# Altium PCB Headstage_Mainboard.PcbDoc
Units mil, origin at the board's own origin, x right, y up, seen from the top; angles counter-clockwise.
Board outline 4600 x 5400 mil, 4 copper layers (Top Copper Layer, Internal Copper Layer 1, Internal Copper Layer 2, Bottom Copper Layer), stack 62.205 mil thick; 8 components, 96 nets, 340 pads, 19 vias.
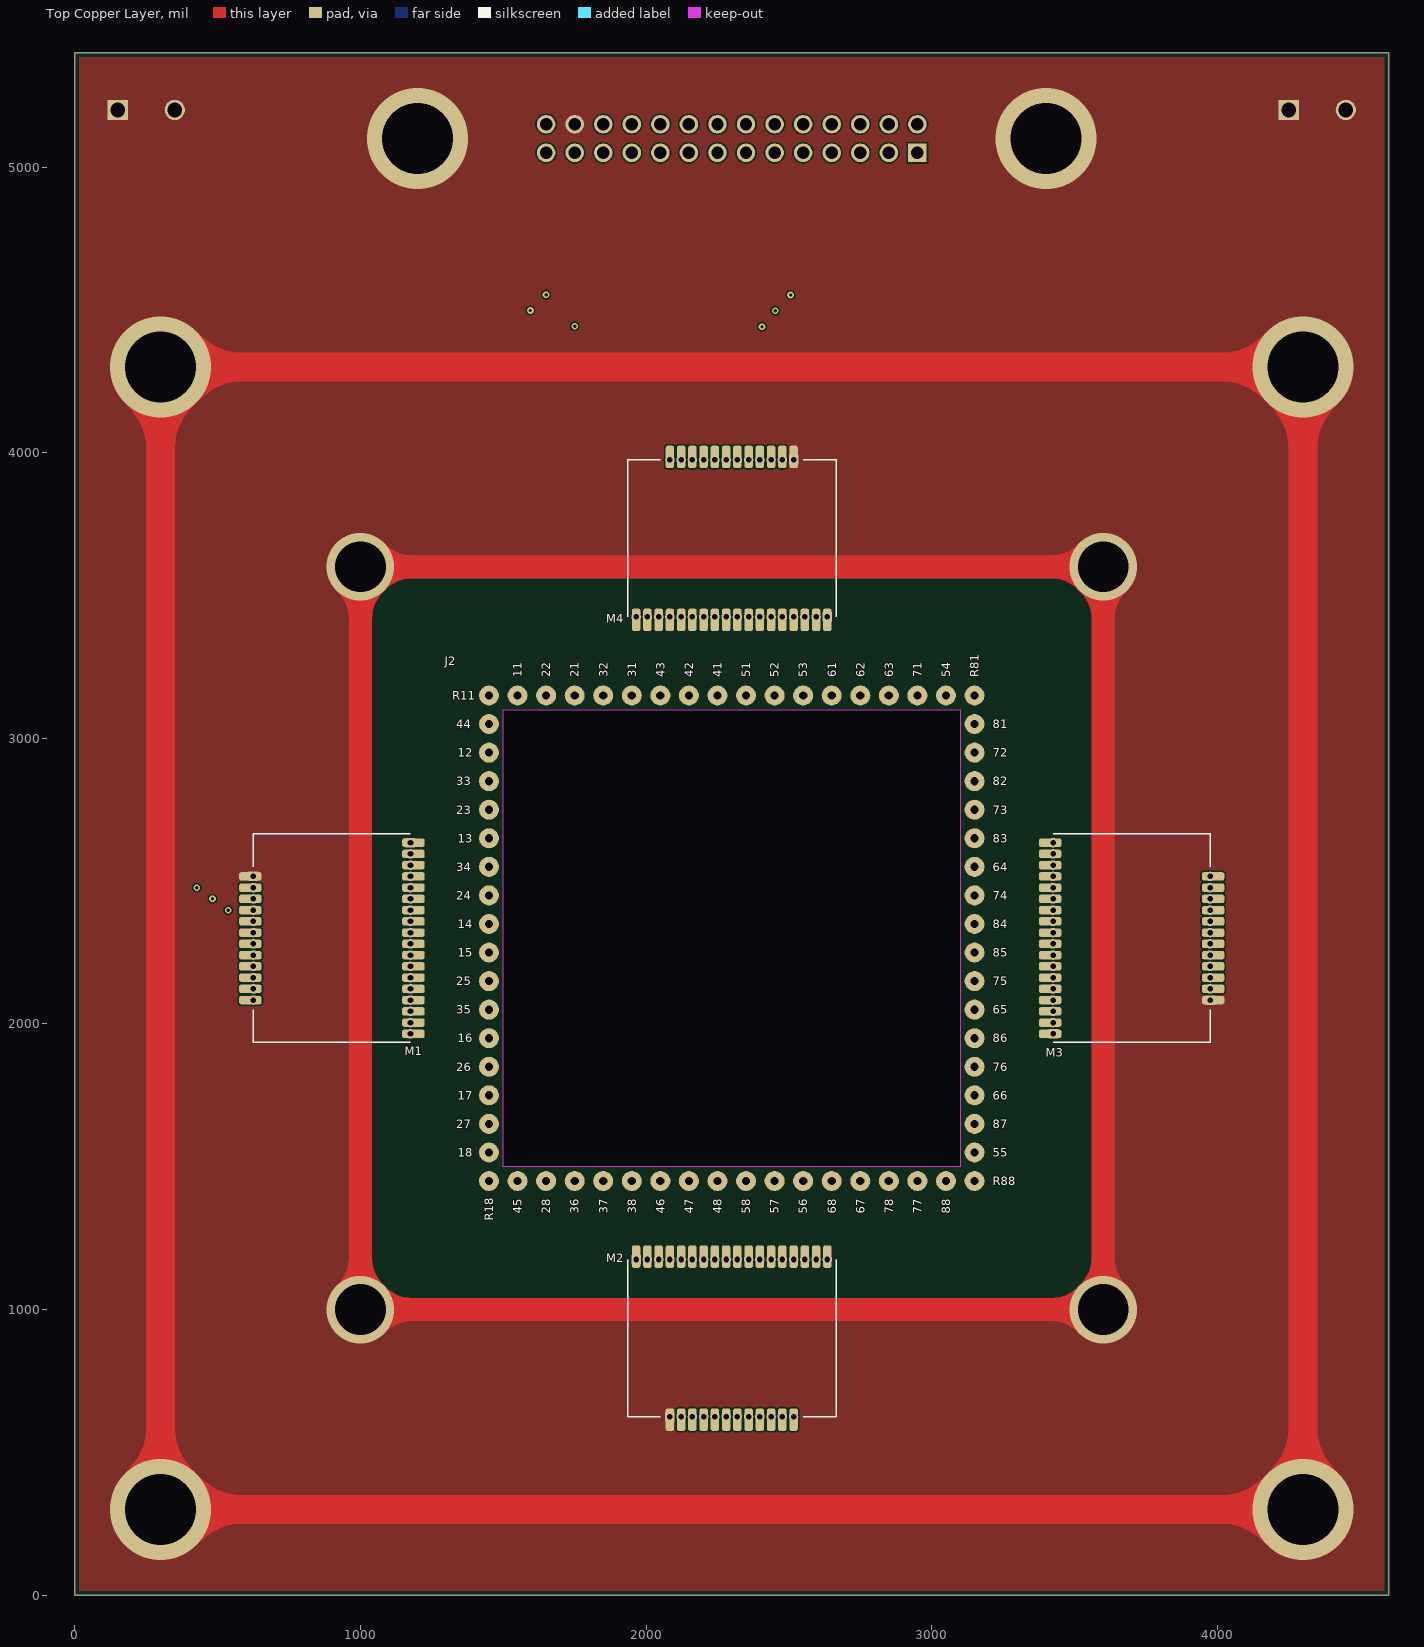
[diagram p0: Top Copper Layer view]
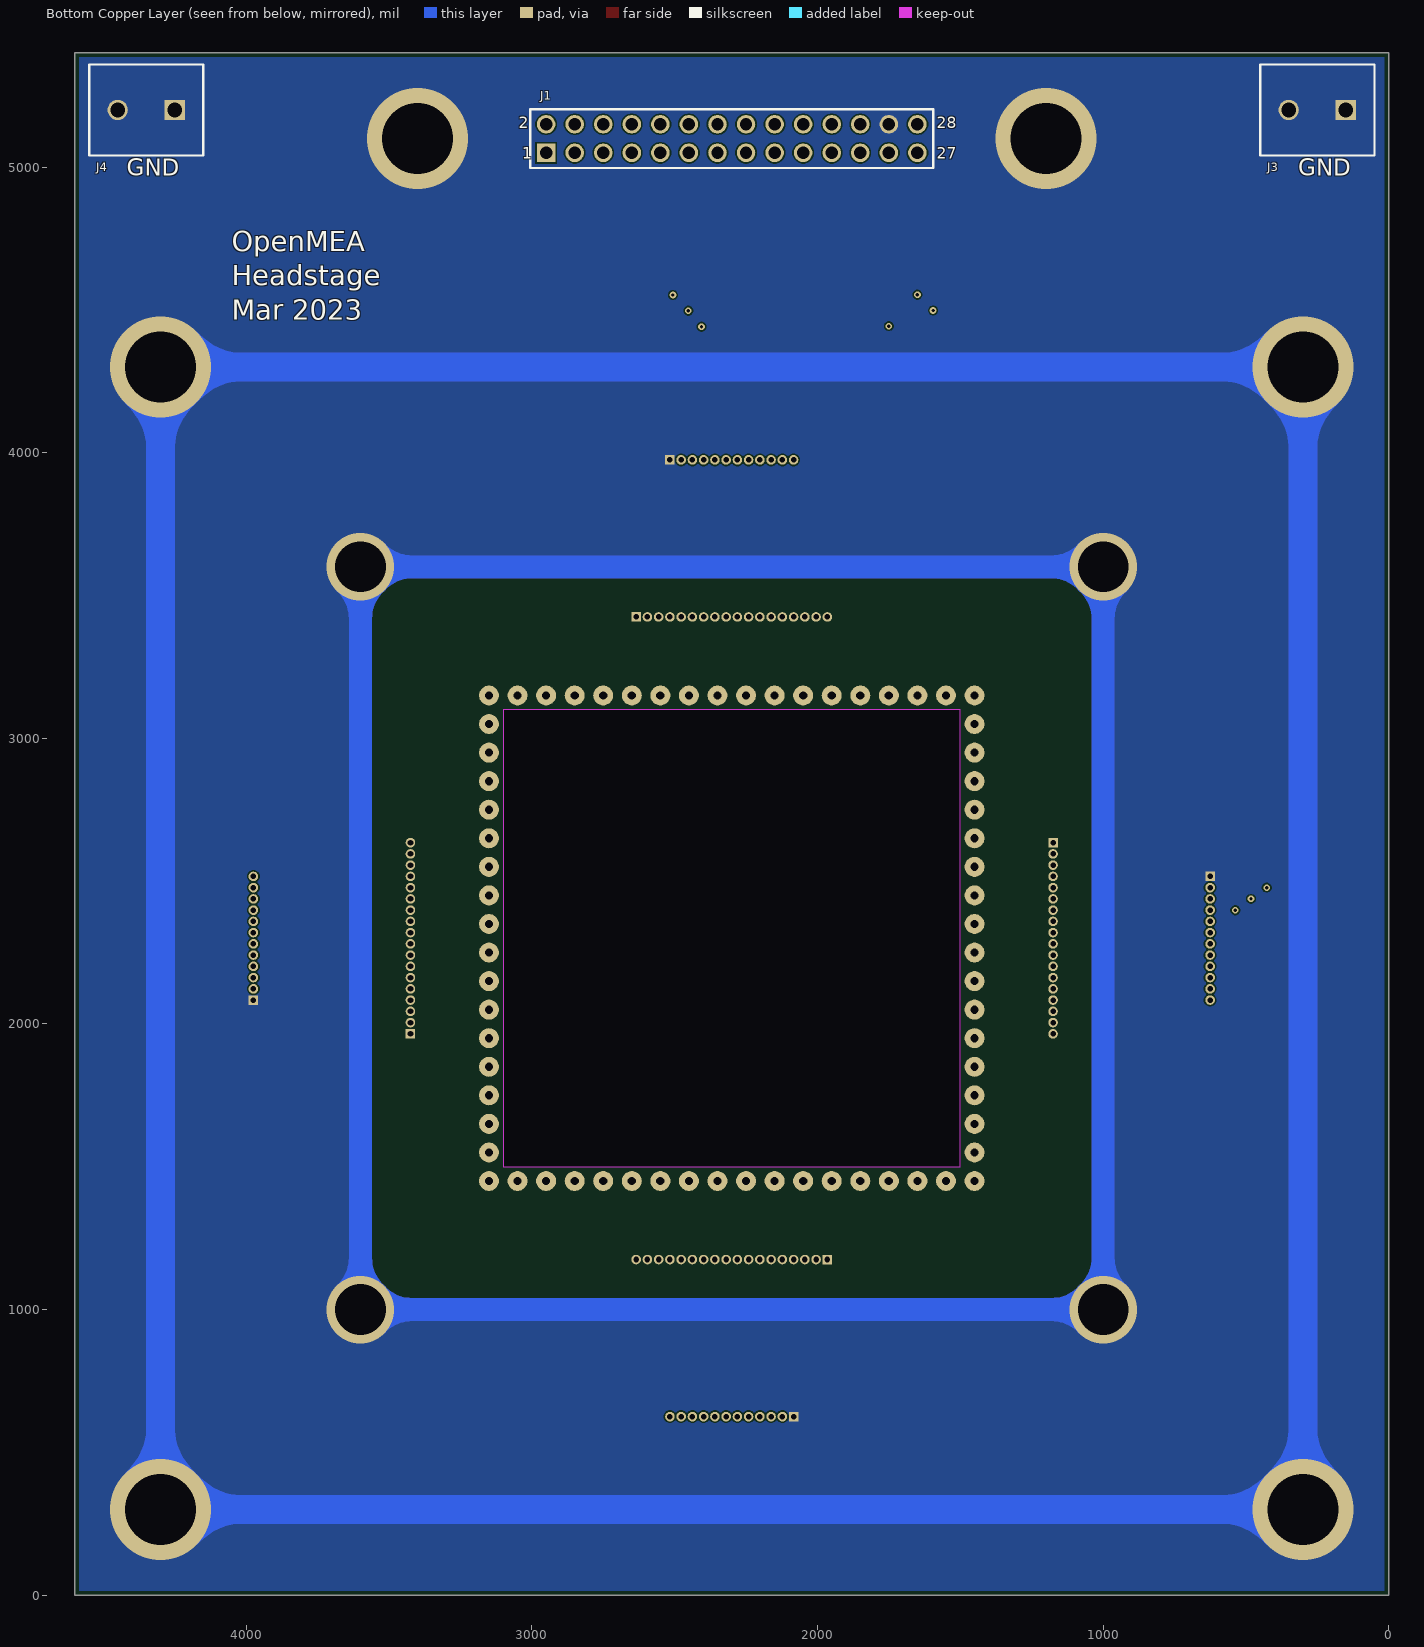
[diagram p1: Bottom Copper Layer view, seen from below]
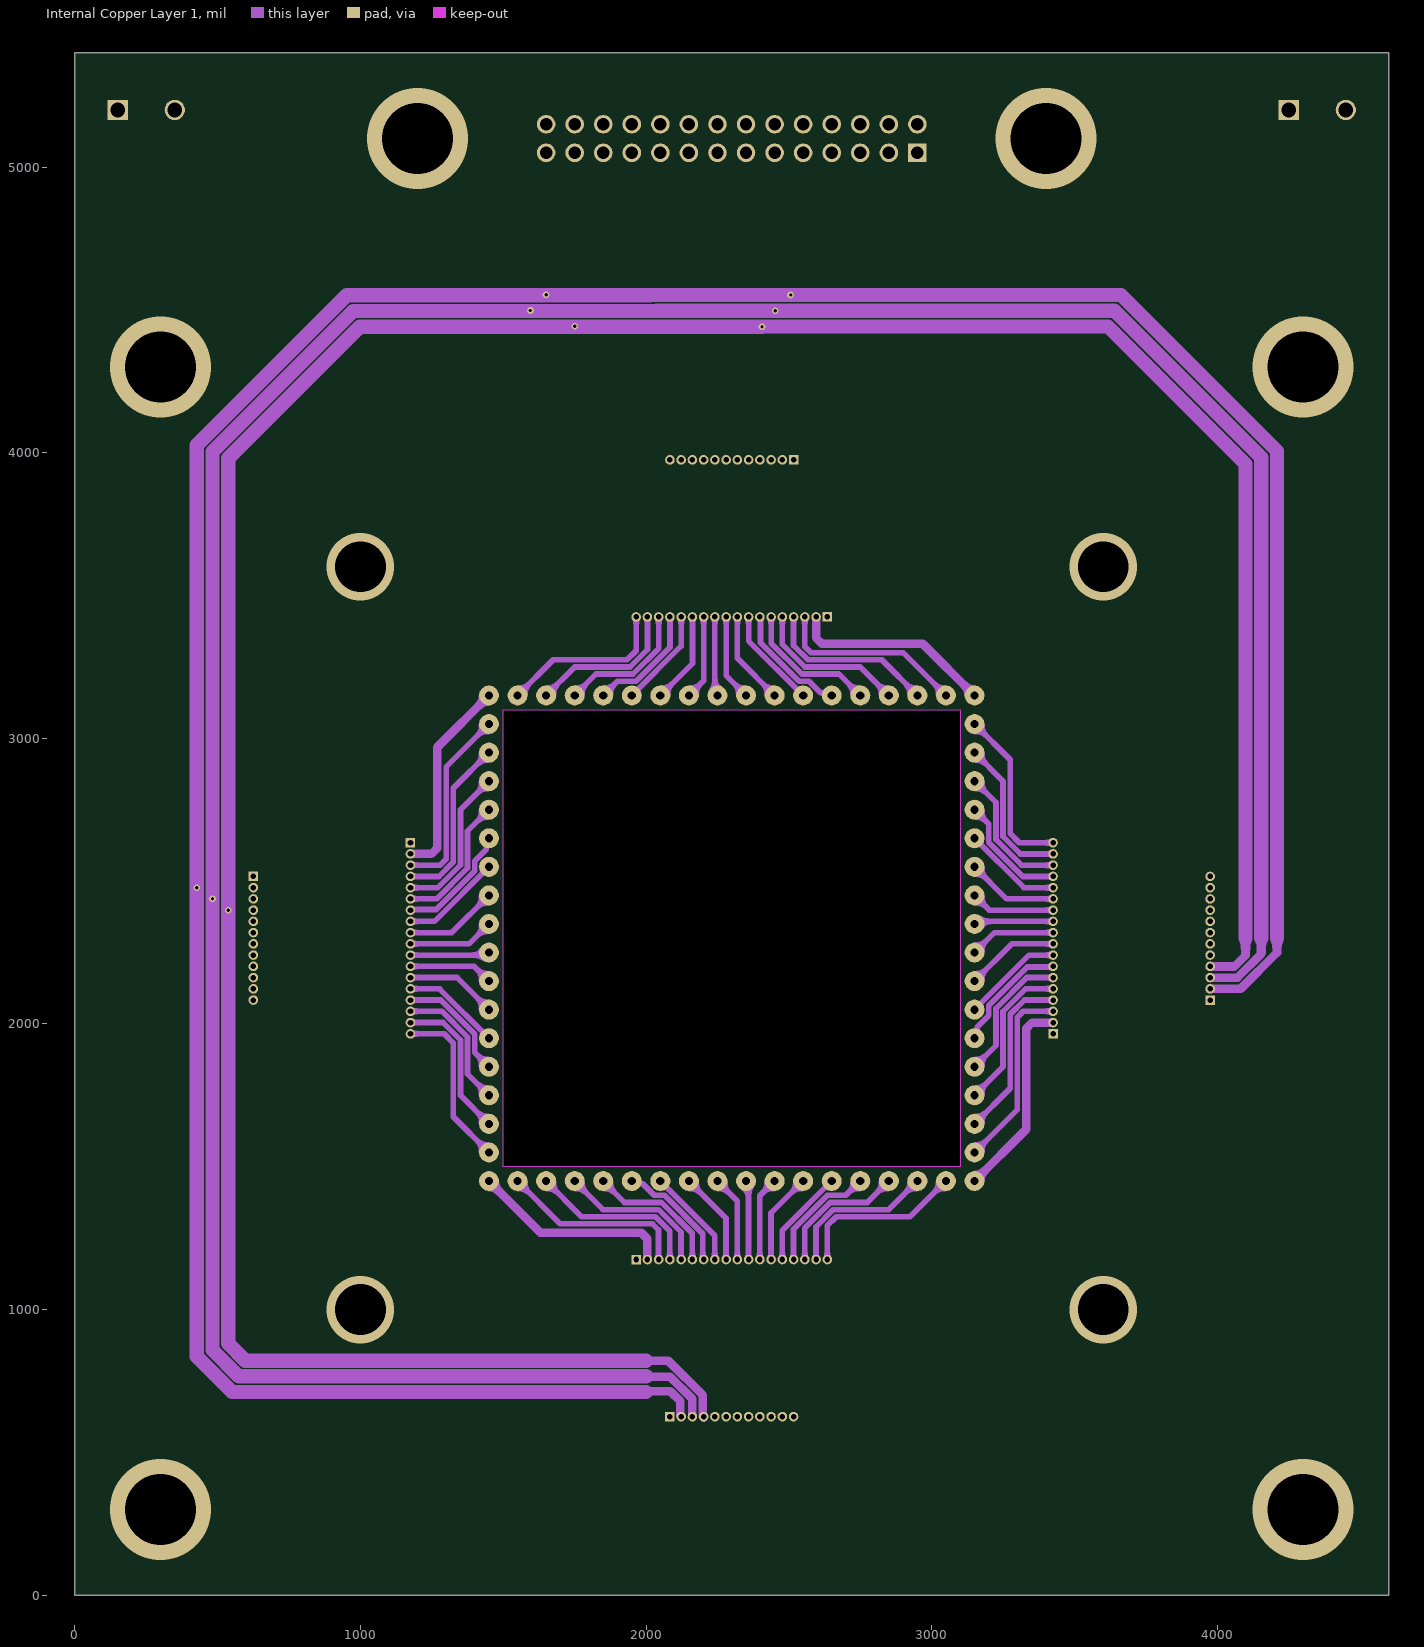
[diagram p2: Internal Copper Layer 1]
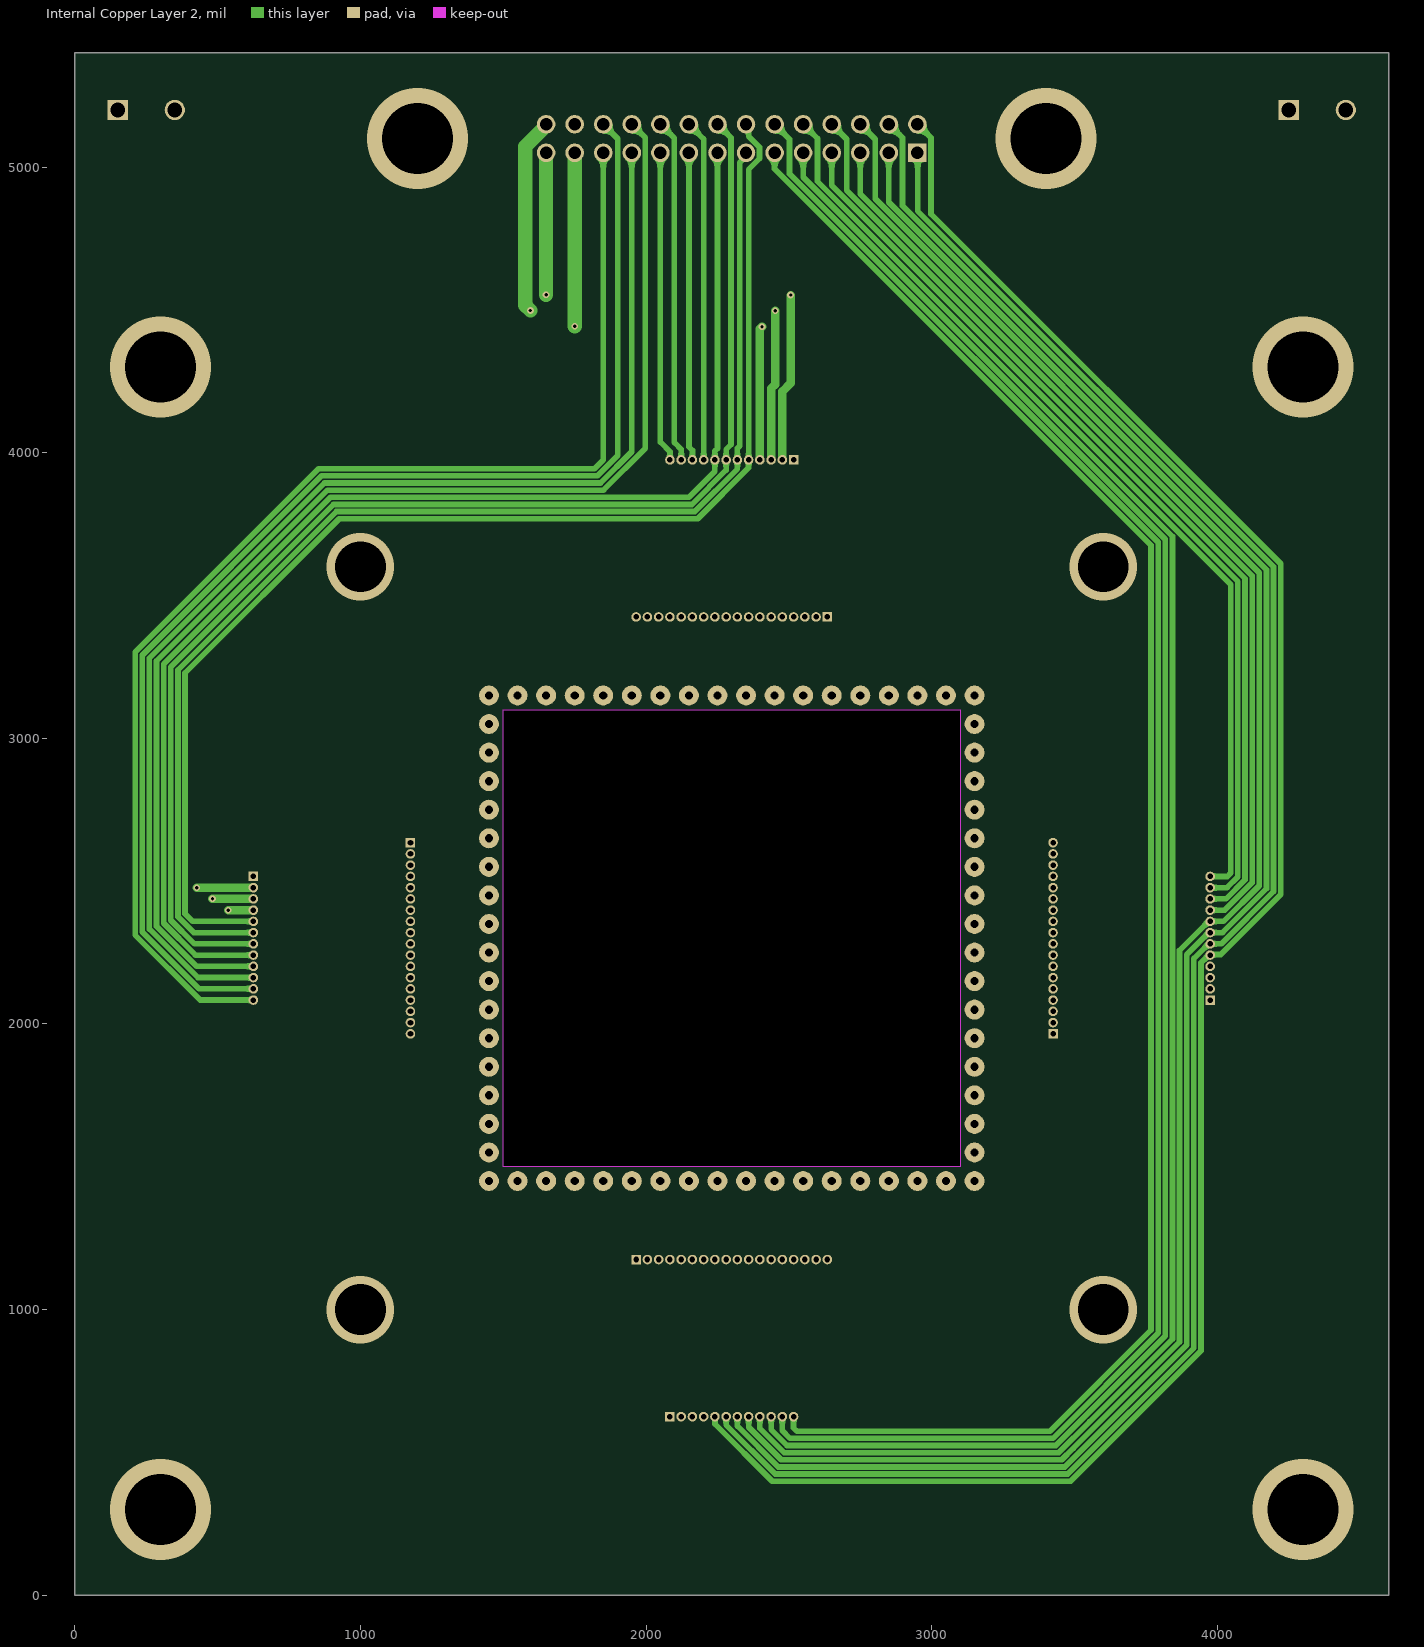
[diagram p3: Internal Copper Layer 2]

## Layer stack, top to bottom
Top Solder: solder mask 0.3937, Solder Resist, Dk 3.5
Top Copper Layer: signal copper 1.378
Dielectric 1: prepreg 8.6614, FR-4, Dk 4.2
Internal Copper Layer 1: signal copper 1.378
Dielectric 2: core 39.3701, FR-4, Dk 4.2
Internal Copper Layer 2: signal copper 1.378
Dielectric 3: prepreg 8.6614, FR-4, Dk 4.2
Bottom Copper Layer: signal copper 1.378
Bottom Solder: solder mask 0.3937, Solder Resist, Dk 3.5

## Board outline
0,0 4600,0 4600,5400 0,5400
cut-out: 1500,3100 3100,3100 3100,1500 1500,1500

## Design rules (kind name [scope] priority, off if disabled: settings)
BoardOutlineClearance [All] p1: gap=15 ignorepadtopadclearanceinfootprint=FALSE
Clearance [All] p1: gap=5 ignorepadtopadclearanceinfootprint=TRUE
ComponentClearance [All] p1: gap=5.91 collisioncheckmode=3 verticalgap=5.91 showdistances=FALSE
HoleSize [All] p1: absolutevalues=TRUE maxlimit=248.03 minlimit=9.84 maxpercent=80.000 minpercent=20.000
HoleToHoleClearance [All] p1: gap=17.72 allowstackedmicrovias=TRUE
MinimumAnnularRing [All] p1: minimumring=5.91
MinimumSolderMaskSliver [All] p1: minsoldermaskwidth=5.9
PlaneClearance [All] p1: clearance=5.91
PlaneConnect [All] p1: planeconnectstyle=Relief reliefexpansion=9.84 reliefentries=4 reliefconductorwidth=5.91 reliefairgap=5.91
PolygonConnect [All] p1: connectstyle=Direct reliefconductorwidth=5.91 reliefentries=4 polygonreliefangle="90 Angle" airgapwidth=5.91
RoomDefinition Headstage_Mainboard [InComponentClass('Headstage_Mainboard')] p1 off: confinementstyle=ConfineIn formatcopy=TRUE lockcomponents=FALSE outline 0,0 2000,0 2000,1000 0,1000
RoutingVias [All] p1: holewidth=9.84 width=21.65 viastyle="Through Hole" minholewidth=9.84 minwidth=21.65 maxholewidth=248.03 maxwidth=354.33
SilkToSilkClearance [All] p1: silktosilkclearance=5
SilkToSolderMaskClearance [IsPad] p1: minsilkscreentomaskgap=7.87 clearancetoexposedcopper=TRUE
SolderMaskExpansion [All] p1: expansion=0 istentingtop=FALSE
Width [All] p1: maxlimit=1968.5 minlimit=5.91 preferedwidth=5.91
22 further rules are at their usual default settings.

## Components (designator, comment, footprint, x,y, rotation, side; value= is the part's Value field where it differs from the comment)
J1 "61302821121" 61302821121 2300,5100 r180 bottom
J2 "POGO_PINS_64_4_V01" POGO_PINS_64_4_V01 2300,2300 r0 top locked
J3 "1729128" PHOE-1729128-2_V 250,5200 r0 bottom
J4 "1729128" PHOE-1729128-2_V 4350,5200 r0 bottom
M1 "Intan_RHS2116_Module" Intan_RHS2116_Module 900,2300 r270 top locked
M2 "Intan_RHS2116_Module" Intan_RHS2116_Module 2300,900 r0 top locked
M3 "Intan_RHS2116_Module" Intan_RHS2116_Module 3700,2300 r90 top locked
M4 "Intan_RHS2116_Module" Intan_RHS2116_Module 2300,3700 r180 top locked

## Footprints (in the part's own frame and the unit in brackets; to place one, negate y for a bottom-side part, rotate by r counter-clockwise, add the part's x,y. Pads: shape width x height; smd on the part's side, far side on the other; paste and mask are expansions set on the pad)
61302821121 [mm] "Pin Header, pitch 2.54 mm, THT, Vertical, dual row, 28p"
  rect 1.65x1.65 hole 1.1: 1(-16.51,-1.27)
  round 1.65 hole 1.1: 2(-16.51,1.27) 3(-13.97,-1.27) 4(-13.97,1.27) 5(-11.43,-1.27) 6(-11.43,1.27) 7(-8.89,-1.27) 8(-8.89,1.27) 9(-6.35,-1.27) 10(-6.35,1.27) 11(-3.81,-1.27) 12(-3.81,1.27) 13(-1.27,-1.27) 14(-1.27,1.27) 15(1.27,-1.27) 16(1.27,1.27) 17(3.81,-1.27) 18(3.81,1.27) 19(6.35,-1.27) 20(6.35,1.27) 21(8.89,-1.27) 22(8.89,1.27) 23(11.43,-1.27) 24(11.43,1.27) 25(13.97,-1.27) 26(13.97,1.27) 27(16.51,-1.27) 28(16.51,1.27)
  silkscreen extent -17.93,-2.62 17.93,2.62, body extent -17.78,-2.54 17.78,2.54, height 8.59
Intan_RHS2116_Module [mm]
  rrect50% 0.75x2 smd: 1(-5.5,-7.25) 2(-4.5,-7.25) 3(-3.5,-7.25) 4(-2.5,-7.25) 5(-1.5,-7.25) 6(-0.5,-7.25) 7(0.5,-7.25) 8(1.5,-7.25) 9(2.5,-7.25) 10(3.5,-7.25) 11(4.5,-7.25) 12(5.5,-7.25) 13(-8.5,7.25) 14(-7.5,7.25) 15(-6.5,7.25) 16(-5.5,7.25) 17(-4.5,7.25) 18(-3.5,7.25) 19(-2.5,7.25) 20(-1.5,7.25) 21(-0.5,7.25) 22(0.5,7.25) 23(1.5,7.25) 24(2.5,7.25) 25(3.5,7.25) 26(4.5,7.25) 27(5.5,7.25) 28(6.5,7.25) 29(7.5,7.25) 30(8.5,7.25)
  rect 0.85x0.85 hole 0.5: 1(-5.5,-6.985) 13(-8.5,6.985)
  round 0.85 hole 0.5: 2(-4.5,-6.985) 3(-3.5,-6.985) 4(-2.5,-6.985) 5(-1.5,-6.985) 6(-0.5,-6.985) 7(0.5,-6.985) 8(1.5,-6.985) 9(2.5,-6.985) 10(3.5,-6.985) 11(4.5,-6.985) 12(5.5,-6.985) 14(-7.5,6.985) 15(-6.5,6.985) 16(-5.5,6.985) 17(-4.5,6.985) 18(-3.5,6.985) 19(-2.5,6.985) 20(-1.5,6.985) 21(-0.5,6.985) 22(0.5,6.985) 23(1.5,6.985) 24(2.5,6.985) 25(3.5,6.985) 26(4.5,6.985) 27(5.5,6.985) 28(6.5,6.985) 29(7.5,6.985) 30(8.5,6.985)
  Top Copper Layer lines w0.254: 1.483,6.813 1.483,6.975 ; -0.38,6.86 -0.494,6.975 ; 4.483,6.884 4.483,6.975 ; 5.463,6.955 5.483,6.975
  Top Copper Layer lines w0.381: 3.557,-6.974 3.526,-6.944 ; 1.557,-6.974 1.467,-6.885 ; 0.557,-6.974 0.467,-6.885 ; -0.443,-6.974 -0.443,-6.892 ; -1.443,-6.974 -1.443,-6.892
  silkscreen extent -9.27,-6.99 9.27,6.99, body extent -9.27,-6.99 9.27,6.98, height 2.6
PHOE-1729128-2_V [mm] "Receptacle, 2-Leads, Body 8.1x10.16mm, Pitch 5.08mm"
  rect 1.8x1.8 hole 1.3: 1(-2.54,0)
  round 1.8 hole 1.3: 2(2.54,0)
  silkscreen extent -5.08,-4.05 5.08,4.05, body extent -5.65,-4.05 5.08,4.05, height 10.01
POGO_PINS_64_4_V01 [mil]
  round 70 hole 29: 11(-750,850) 12(-850,650) 13(-850,350) 14(-850,50) 15(-850,-50) 16(-850,-350) 17(-850,-550) 18(-850,-750) 21(-550,850) 22(-650,850) 23(-850,450) 24(-850,150) 25(-850,-150) 26(-850,-450) 27(-850,-650) 28(-650,-850) 31(-350,850) 32(-450,850) 33(-850,550) 34(-850,250) 35(-850,-250) 36(-550,-850) 37(-450,-850) 38(-350,-850) 41(-50,850) 42(-150,850) 43(-250,850) 44(-850,750) 45(-750,-850) 46(-250,-850) 47(-150,-850) 48(-50,-850) 51(50,850) 52(150,850) 53(250,850) 54(750,850) 55(850,-750) 56(250,-850) 57(150,-850) 58(50,-850) 61(350,850) 62(450,850) 63(550,850) 64(850,250) 65(850,-250) 66(850,-550) 67(450,-850) 68(350,-850) 71(650,850) 72(850,650) 73(850,450) 74(850,150) 75(850,-150) 76(850,-450) 77(650,-850) 78(550,-850) 81(850,750) 82(850,550) 83(850,350) 84(850,50) 85(850,-50) 86(850,-350) 87(850,-650) 88(750,-850) R11(-850,850) R18(-850,-850) R81(850,850) R88(850,-850)
  body extent -886,-886 886,886, height 303

## Part data
J1: library part CMP-1502-01115-1, "THT Vertical Pin Header WR-PHD, Pitch 2.54 mm, Dual Row, 28 pins", Contact Resistance=20mOhm, Manufacturer="Wurth Elektronik", Operating Temperature=-40to105degC, Rated Current=3A, Withstanding Voltage=500VAC, Working Voltage=250VAC, Datasheet URL=https://katalog.we-online.de/em/datasheet/6130xx21121.pdf, Gender=Male, Manufacturer URL=http://www.we-online.de, Mounting Technology=THT, Orientation=Vertical, Package Reference=61302821121, Packaging=Bag, Part Number=61302821121, Pin Number=28, Pitch=2.54mm, Publisher=WurthElektronik, Row Number=Dual
J2: "Pogo pins, 64 recording, 4 reference, v01"
J3 J4: library part CMP-2000-05815-1, "PCB Terminal Block, 13.5 A, 400 V, 2-Pin THD, RoHS, Bulk", Current Rating=13500mA, Manufacturer="Phoenix Contact", Package Description="2-Pin Through Hole Device, Body 8.1 x 10.16 mm, Pitch 5.08 mm", Package Reference=1729128-2, Package Version=03/2015, Voltage Rating=400V, Datasheet URL=https://datasheet.ciiva.com/16046/1729128-16046181.pdf, Datasheet Version=12/2013, Manufacturer URL=http://www.phoenixcontact.com/, Mounting Technology=ThroughHole, No. of Positions=2, No. of Rows=1, Orientation=Horizontal, Package URL=https://www.phoenixcontact.com/online/portal/pi/pxc/product_detail_page/!ut/p/b1/3VdJjqNKFDxLH8AFycySyWY2ozFsEPOMMQaDOX1XedGL_1Vdm5YXJleknhSKeBkvI6EA8ncAo3AYoDhBQGco6KN7VURTdemj9us_IEKEZo_YHiPAEWEFmDGOHMORkqKYCORBZxgL7ZoaZYcbFFUZ3fqxSY6GOuxydWUuHqz1ynmMFygu583Bob0Ewr6Sd_l-5m-kAueHiB0jpRwZwe58wwtkpxtMYd_LmGcDRU02dRNEyWt6Y2ti5pSyJ_reIkzIulrqApdnbT11V5jnCKbYNCvhEM1MCpPByat_X379-iThf08CI5GfOPqfBeS3BRoBOdD55AKVv0iLwCMq-2BrzXWSGRH7pUGD9uwXQjiph3xL0DKQwdGa0JImiIOmBNOestqgwTHSSs2oOep-78apyXQBvNi8ZLaFjvjWvcaUEBu0MC6Wbe-d6mB0FAebo2lUWinqYaZs5DAYzV0RP9yitUjnGJ0iI9xhZkT42OCQNUJJhkgWINNQLP2JFP6OpMg3JCVg70jqHT0lvKOnhHf0lPuOnnLf0VPuWx6_dxwUIvwk5WMkT0kLL1mh61l2yZVSzG3pYV_bqo-mj6uMKwKwdnnW8Jh5RTOJzMOA5c-eJDaZQw4mTMPH02PvS_ZAqNVjVTo2WyYLkwH_KU1mmmG5kjRhDqPXLwwVHvVOjCM60-fpXvTDfMGW1PVFVS1r4e4yVDk4ZdNbkUHvqPqQSeian4UD39fNKmachqdJ1NJbyk8rXT9mXTvPk3oE5meulKGgiruPJek-4I9hTT6G8ZLOyRSm2RRVbThERQad5OS28hdt4YW4vG0stgYYzsWsK4_7y6DZMjJSCqri1kyiZR5vD7pwIrNR7QwPHTcLTI5qT7eRlpHrdGiupYlqQDJ7zy_CND8fWWBoLRXxk1RVcXiBQwbTD4Xi7KL-FuO94t9xaqweXzH, Packing=Bulk, PartNumber=1729128, Pitch=5.08mm, RoHS=TRUE

## Via types
v1: diameter 23.62, hole 11.81, Top Copper Layer to Bottom Copper Layer, tented both sides, 9 vias
v2: diameter 354.33, hole 248.03, Top Copper Layer to Bottom Copper Layer, 6 vias
v3: diameter 236.22, hole 177.17, Top Copper Layer to Bottom Copper Layer, 4 vias

## Nets (pads, with @x,y where several pads share a name; then routed paths per layer and width w, separated by ;. In a path a pad name is that pad's centre, name@x,y a point inside that pad or via, vN(x,y) a via of type N, cw(c..) or ccw(c..) an arc to the next point about the centre after c; other vN are vias at no path point)
E1_0: J2.44 M1.15 | length 669
  Internal Copper Layer 1 w20: M1.15@1175,2555.91 1279.13,2555.91 1300,2576.78 1300,2900 J2.44
E1_1: J2.12 M1.16 | length 606
  Internal Copper Layer 1 w20: M1.16@1175,2516.54 1275.11,2516.54 1325,2566.42 1325,2825 J2.12
E1_2: J2.33 M1.17 | length 543
  Internal Copper Layer 1 w20: M1.17@1175,2477.17 1271.1,2477.17 1350,2556.07 1350,2750 J2.33
E1_3: J2.23 M1.18 | length 480.1
  Internal Copper Layer 1 w20: M1.18@1175,2437.8 1267.09,2437.8 1375,2545.71 1375,2675 J2.23
E1_4: J2.13 M1.19 | length 417.1
  Internal Copper Layer 1 w20: M1.19@1175,2398.43 1177.58,2401 1265.65,2401 1400,2535.36 1400,2570.71 1440.43,2611.14 1440.43,2640.43 J2.13
E1_5: J2.34 M1.20 | length 354.1
  Internal Copper Layer 1 w20: M1.20@1175,2359.06 1259.06,2359.06 J2.34
E1_6: J2.24 M1.21 | length 329
  Internal Copper Layer 1 w20: M1.21@1175,2319.69 1319.69,2319.69 J2.24
E1_7: J2.14 M1.22 | length 303.9
  Internal Copper Layer 1 w20: M1.22@1175,2280.32 1380.32,2280.32 J2.14
E1_8: J2.15 M1.23 | length 278.8
  Internal Copper Layer 1 w20: M1.23@1175,2240.95 1440.95,2240.95 J2.15
E1_9: J2.25 M1.24 | length 296.4
  Internal Copper Layer 1 w20: M1.24@1175,2201.58 1398.42,2201.58 J2.25
E1_10: J2.35 M1.25 | length 321.5
  Internal Copper Layer 1 w20: M1.25@1175,2162.21 1337.79,2162.21 J2.35
E1_11: J2.16 M1.26 | length 346.6
  Internal Copper Layer 1 w20: M1.26@1175,2122.84 1277.16,2122.84 J2.16
E1_12: J2.26 M1.27 | length 409.6
  Internal Copper Layer 1 w20: M1.27@1175,2083.47 1281.18,2083.47 1400,1964.64 1400,1900 J2.26
E1_13: J2.17 M1.28 | length 472.6
  Internal Copper Layer 1 w20: M1.28@1175,2044.1 1285.19,2044.1 1375,1954.29 1375,1825 J2.17
E1_14: J2.27 M1.29 | length 535.5
  Internal Copper Layer 1 w20: M1.29@1175,2004.73 1289.21,2004.73 1350,1943.93 1350,1750 J2.27
E1_15: J2.18 M1.30 | length 598.5
  Internal Copper Layer 1 w20: M1.30@1175,1965.36 1293.22,1965.36 1325,1933.58 1325,1675 J2.18
E1_REF: J2.R11 M1.14 | length 711.6
  Internal Copper Layer 1 w30: M1.14@1175,2595.28 1248.28,2595.28 1269,2616 1269,2969 J2.R11
E2_0: J2.45 M2.15 | length 669
  Internal Copper Layer 1 w20: J2.45@1549.36,1449.89 1699.36,1299.89 2022.58,1299.89 2043.45,1279.02 M2.15@2043.45,1174.89
E2_1: J2.28 M2.16 | length 606
  Internal Copper Layer 1 w20: J2.28@1649.36,1449.89 1774.36,1324.89 2032.93,1324.89 2082.82,1275 M2.16@2082.82,1174.89
E2_2: J2.36 M2.17 | length 543
  Internal Copper Layer 1 w20: J2.36@1749.36,1449.89 1849.36,1349.89 2043.29,1349.89 2122.19,1270.99 M2.17@2122.19,1174.89
E2_3: J2.37 M2.18 | length 480.1
  Internal Copper Layer 1 w20: J2.37@1849.36,1449.89 1924.36,1374.89 2053.64,1374.89 2161.56,1266.97 M2.18@2161.56,1174.89
E2_4: J2.38 M2.19 | length 417.1
  Internal Copper Layer 1 w20: J2.38@1949.36,1449.89 1958.92,1440.32 1988.21,1440.32 2028.65,1399.89 2064,1399.89 2198.35,1265.54 2198.35,1177.46 M2.19@2200.93,1174.89
E2_5: J2.46 M2.20 | length 354.1
  Internal Copper Layer 1 w20: J2.46@2049.36,1449.89 2240.3,1258.94 M2.20@2240.3,1174.89
E2_6: J2.47 M2.21 | length 329
  Internal Copper Layer 1 w20: J2.47@2149.36,1449.89 2279.67,1319.57 M2.21@2279.67,1174.89
E2_7: J2.48 M2.22 | length 303.9
  Internal Copper Layer 1 w20: J2.48@2249.36,1449.89 2319.04,1380.2 M2.22@2319.04,1174.89
E2_8: J2.58 M2.23 | length 278.8
  Internal Copper Layer 1 w20: J2.58@2349.36,1449.89 2358.41,1440.83 M2.23@2358.41,1174.89
E2_9: J2.57 M2.24 | length 296.4
  Internal Copper Layer 1 w20: M2.24@2397.78,1174.89 2397.78,1398.31 J2.57@2449.36,1449.89
E2_10: J2.56 M2.25 | length 321.5
  Internal Copper Layer 1 w20: M2.25@2437.15,1174.89 2437.15,1337.68 J2.56@2549.36,1449.89
E2_11: J2.68 M2.26 | length 346.6
  Internal Copper Layer 1 w20: M2.26@2476.52,1174.89 2476.52,1277.05 J2.68@2649.36,1449.89
E2_12: J2.67 M2.27 | length 409.6
  Internal Copper Layer 1 w20: M2.27@2515.89,1174.89 2515.89,1281.07 2634.71,1399.89 2699.36,1399.89 J2.67@2749.36,1449.89
E2_13: J2.78 M2.28 | length 472.6
  Internal Copper Layer 1 w20: M2.28@2555.26,1174.89 2555.26,1285.08 2645.07,1374.89 2774.36,1374.89 J2.78@2849.36,1449.89
E2_14: J2.77 M2.29 | length 535.5
  Internal Copper Layer 1 w20: M2.29@2594.63,1174.89 2594.63,1289.1 2655.42,1349.89 2849.36,1349.89 J2.77@2949.36,1449.89
E2_15: J2.88 M2.30 | length 598.5
  Internal Copper Layer 1 w20: M2.30@2634,1174.89 2634,1293.11 2665.78,1324.89 2924.36,1324.89 J2.88@3049.36,1449.89
E2_REF: J2.R18 M2.14 | length 711.6
  Internal Copper Layer 1 w30: J2.R18@1449.36,1449.89 1630.36,1268.89 1983.36,1268.89 2004.08,1248.16 M2.14@2004.08,1174.89
E3_0: J2.55 M3.15 | length 669
  Internal Copper Layer 1 w20: J2.55 3300,1700 3300,2023.22 3320.87,2044.09 M3.15@3425,2044.09
E3_1: J2.87 M3.16 | length 606
  Internal Copper Layer 1 w20: J2.87 3275,1775 3275,2033.58 3324.89,2083.46 M3.16@3425,2083.46
E3_2: J2.66 M3.17 | length 543
  Internal Copper Layer 1 w20: J2.66 3250,1850 3250,2043.93 3328.9,2122.83 M3.17@3425,2122.83
E3_3: J2.76 M3.18 | length 480.1
  Internal Copper Layer 1 w20: J2.76 3225,1925 3225,2054.29 3332.91,2162.2 M3.18@3425,2162.2
E3_4: J2.86 M3.19 | length 417.1
  Internal Copper Layer 1 w20: J2.86 3159.57,1959.57 3159.57,1988.86 3200,2029.29 3200,2064.64 3334.35,2199 3422.42,2199 M3.19@3425,2201.57
E3_5: J2.65 M3.20 | length 354.1
  Internal Copper Layer 1 w20: J2.65 3340.94,2240.94 M3.20@3425,2240.94
E3_6: J2.75 M3.21 | length 329
  Internal Copper Layer 1 w20: J2.75 3280.31,2280.31 M3.21@3425,2280.31
E3_7: J2.85 M3.22 | length 303.9
  Internal Copper Layer 1 w20: J2.85 3219.68,2319.68 M3.22@3425,2319.68
E3_8: J2.84 M3.23 | length 278.8
  Internal Copper Layer 1 w20: J2.84 3159.05,2359.05 M3.23@3425,2359.05
E3_9: J2.74 M3.24 | length 296.4
  Internal Copper Layer 1 w20: J2.74 3201.58,2398.42 M3.24@3425,2398.42
E3_10: J2.64 M3.25 | length 321.5
  Internal Copper Layer 1 w20: J2.64 3262.21,2437.79 M3.25@3425,2437.79
E3_11: J2.83 M3.26 | length 346.6
  Internal Copper Layer 1 w20: J2.83 3322.84,2477.16 M3.26@3425,2477.16
E3_12: J2.73 M3.27 | length 409.6
  Internal Copper Layer 1 w20: J2.73 3200,2700 3200,2635.36 3318.82,2516.53 M3.27@3425,2516.53
E3_13: J2.82 M3.28 | length 472.6
  Internal Copper Layer 1 w20: J2.82 3225,2775 3225,2645.71 3314.81,2555.9 M3.28@3425,2555.9
E3_14: J2.72 M3.29 | length 535.5
  Internal Copper Layer 1 w20: J2.72 3250,2850 3250,2656.07 3310.79,2595.27 M3.29@3425,2595.27
E3_15: J2.81 M3.30 | length 598.5
  Internal Copper Layer 1 w20: J2.81 3275,2925 3275,2666.42 3306.78,2634.64 M3.30@3425,2634.64
E3_REF: J2.R88 M3.14 | length 711.6
  Internal Copper Layer 1 w30: J2.R88 3331,1631 3331,1984 3351.72,2004.72 M3.14@3425,2004.72
E4_0: J2.54 M4.15 | length 669
  Internal Copper Layer 1 w20: M4.15@2555.91,3425 2555.91,3320.87 2576.78,3300 2900,3300 J2.54
E4_1: J2.71 M4.16 | length 606
  Internal Copper Layer 1 w20: M4.16@2516.54,3425 2516.54,3324.89 2566.42,3275 2825,3275 J2.71
E4_2: J2.63 M4.17 | length 543
  Internal Copper Layer 1 w20: M4.17@2477.17,3425 2477.17,3328.9 2556.07,3250 2750,3250 J2.63
E4_3: J2.62 M4.18 | length 480.1
  Internal Copper Layer 1 w20: M4.18@2437.8,3425 2437.8,3332.91 2545.71,3225 2675,3225 J2.62
E4_4: J2.61 M4.19 | length 417.1
  Internal Copper Layer 1 w20: M4.19@2398.43,3425 2401,3422.42 2401,3334.35 2535.36,3200 2570.71,3200 2611.14,3159.57 2640.43,3159.57 J2.61
E4_5: J2.53 M4.20 | length 354.1
  Internal Copper Layer 1 w20: M4.20@2359.06,3425 2359.06,3340.94 J2.53
E4_6: J2.52 M4.21 | length 329
  Internal Copper Layer 1 w20: M4.21@2319.69,3425 2319.69,3280.31 J2.52
E4_7: J2.51 M4.22 | length 303.9
  Internal Copper Layer 1 w20: M4.22@2280.32,3425 2280.32,3219.68 J2.51
E4_8: J2.41 M4.23 | length 278.8
  Internal Copper Layer 1 w20: M4.23@2240.95,3425 2240.95,3159.05 J2.41
E4_9: J2.42 M4.24 | length 296.4
  Internal Copper Layer 1 w20: J2.42 2201.58,3201.58 M4.24@2201.58,3425
E4_10: J2.43 M4.25 | length 321.5
  Internal Copper Layer 1 w20: J2.43 2162.21,3262.21 M4.25@2162.21,3425
E4_11: J2.31 M4.26 | length 346.6
  Internal Copper Layer 1 w20: J2.31 2122.84,3322.84 M4.26@2122.84,3425
E4_12: J2.32 M4.27 | length 409.6
  Internal Copper Layer 1 w20: J2.32 1900,3200 1964.64,3200 2083.47,3318.82 M4.27@2083.47,3425
E4_13: J2.21 M4.28 | length 472.6
  Internal Copper Layer 1 w20: J2.21 1825,3225 1954.29,3225 2044.1,3314.81 M4.28@2044.1,3425
E4_14: J2.22 M4.29 | length 535.5
  Internal Copper Layer 1 w20: J2.22 1750,3250 1943.93,3250 2004.73,3310.79 M4.29@2004.73,3425
E4_15: J2.11 M4.30 | length 598.5
  Internal Copper Layer 1 w20: J2.11 1675,3275 1933.58,3275 1965.36,3306.78 M4.30@1965.36,3425
E4_REF: J2.R81 M4.14 | length 711.6
  Internal Copper Layer 1 w30: M4.14@2595.28,3425 2595.28,3351.72 2616,3331 2969,3331 J2.R81
GND: J1.26 J3.1 J3.2 J4.1 J4.2 M1.1 M2.1 M3.1 M4.1 | length 52800
  Top Copper Layer w80: v3(1000,1000) v3(1000,3600) v3(3600,3600) v3(3600,1000) v3(1000,1000)
  Top Copper Layer w100: v2(300,300) v2(300,4300) v2(4300,4300) v2(4300,300) v2(300,300)
  Bottom Copper Layer w80: v3(1000,1000) v3(1000,3600) v3(3600,3600) v3(3600,1000) v3(1000,1000)
  Bottom Copper Layer w100: v2(300,300) v2(300,4300) v2(4300,4300) v2(4300,300) v2(300,300)
  other v2: 1200,5100 3400,5100
M1_MISON: J1.24 M1.11 | length 4576.4
  Internal Copper Layer 2 w20: M1.11@625,2123 434.58,2123 236,2321.58 236,3291.13 863.87,3919 1830.05,3919 1901,3989.95 1901,5099 J1.24
M1_MISOP: J1.23 M1.12 | length 4492
  Internal Copper Layer 2 w20: M1.12@625,2083.47 438.76,2083.47 211,2311.22 211,3301.49 853.51,3944 1819.7,3944 1850,3974.3 J1.23
M1_MOSIN: J1.22 M1.9 | length 4499.6
  Internal Copper Layer 2 w20: M1.9@625,2201.58 426.71,2201.58 286,2342.29 286,3270.42 884.58,3869 1850.76,3869 1997.48,4015.72 1997.48,5102.52 J1.22
M1_MOSIP: J1.21 M1.10 | length 4417.8
  Internal Copper Layer 2 w20: M1.10@625,2162.21 430.73,2162.21 261,2331.93 261,3280.78 874.22,3894 1840.41,3894 1949.59,4003.18 J1.21@1949.59,5050
M2_MISON: J1.12 M2.11 | length 6317.6
  Internal Copper Layer 2 w20: J1.12 2502.52,5097.48 2502.52,4976.84 3793,3686.36 3793,3628 3793,917.64 3424.36,549 2554.71,549 2504.13,549 2476.71,576.42 M2.11@2476.71,625
M2_MISOP: J1.11 M2.12 | length 6110.2
  Internal Copper Layer 2 w20: J1.11 2450,4994 3768,3676 3768,928 3414,574 2528.25,574 2516.53,585.72 M2.12@2516.53,625
M2_MOSIN: J1.10 M2.9 | length 6474.3
  Internal Copper Layer 2 w20: M2.9@2398.42,625 2398.42,584 2483.42,499 2534,499 3445.07,499 3552.07,606 3843,896.93 3843,3707.07 2600,4950.07 2600,5100 J1.10
M2_MOSIP: J1.9 M2.10 | length 6275.1
  Internal Copper Layer 2 w20: M2.10@2437.79,625 2437.79,579.98 2493.78,524 2544.35,524 3434.71,524 3818,907.29 3818,3696.71 2550,4964.71 J1.9
M3_MISON: J1.8 M3.11 | length 3336.6
  Internal Copper Layer 2 w20: J1.8 2702.52,5097.48 2702.52,5080.53 2702.52,4918.26 4072,3548.78 4072,2515.13 4034.03,2477.16 M3.11@3975,2477.16
M3_MISOP: J1.7 M3.12 | length 3177.3
  Internal Copper Layer 2 w20: J1.7 2650,4935.42 4047,3538.42 4047,2528.25 4035.28,2516.53 M3.12@3975,2516.53
M3_MOSIN: J1.6 M3.9 | length 3410.6
  Internal Copper Layer 2 w20: J1.6 2802.52,5097.48 2802.52,4888.97 4122,3569.49 4122,2494.42 4026,2398.42 M3.9@3975,2398.42
M3_MOSIP: J1.5 M3.10 | length 3252.9
  Internal Copper Layer 2 w20: J1.5 2750,4906.13 4097,3559.13 4097,2504.78 4030.02,2437.79 M3.10@3975,2437.79
M4_MISON: J1.20 M4.11 | length 1205.2
  Internal Copper Layer 2 w20: J1.20 2099,5101 2099,4036 2122.84,4012.16 M4.11@2122.84,3975
M4_MISOP: J1.19 M4.12 | length 1088.9
  Internal Copper Layer 2 w20: J1.19 2050,4037 2083.47,4003.53 M4.12@2083.47,3975
M4_MOSIN: J1.18 M4.9 | length 1196.4
  Internal Copper Layer 2 w20: J1.18 2201.58,5098.42 M4.9@2201.58,3975
M4_MOSIP: J1.17 M4.10 | length 1080.1
  Internal Copper Layer 2 w20: J1.17 2150,4020.4 2162.21,4008.2 M4.10@2162.21,3975
M14_CSN: J1.14 M1.5 M4.5 | length 4605.8
  Internal Copper Layer 2 w20: M1.5@625,2359.06 412.94,2359.06 386,2386 386,3229 926,3769 2181,3769 2359.06,3947.06 M4.5@2359.06,3978.64 ; J1.14 2358.6,5141.4 2358.6,5116.26 2359.06,5115.8 2359.06,5108.09 2397.48,5069.67 2397.48,5030.33 2359.06,4991.91 M4.5@2359.06,3975
M14_CSP: J1.13 M1.6 M4.6 | length 4524.6
  Internal Copper Layer 2 w20: M1.6@625,2319.69 416.31,2319.69 361,2375 361,3239.36 915.64,3794 2170.64,3794 2319.69,3943.04 M4.6@2319.69,3978.64 ; M4.6@2319.69,3975 2319.69,4015.21 2328,4023.52 2328,5015.83 2350,5037.83 J1.13
M14_SCLKN: J1.16 M1.7 M4.7 | length 4681.2
  Internal Copper Layer 2 w20: M1.7@625,2280.32 418.68,2280.32 336,2363 336,3249.71 905.29,3819 2160.29,3819 2280.32,3939.03 M4.7@2280.32,3978.64 ; J1.16 2297.48,5102.52 2297.48,4028.36 2280.32,4011.19 M4.7@2280.32,3975
M14_SCLKP: J1.15 M1.8 M4.8 | length 4599.6
  Internal Copper Layer 2 w20: M1.8@625,2240.95 422.7,2240.95 311,2352.64 311,3260.07 894.93,3844 2149.93,3844 2240.95,3935.01 M4.8@2240.95,3978.64 ; M4.8@2240.95,3975 2240.95,4005.95 2250,4015 J1.15
M23_CSN: J1.2 M2.5 M3.5 | length 6960
  Internal Copper Layer 2 w20: M2.5@2240.94,625 2241.52,624.43 2241.52,599.48 2442,399 3486.49,399 3943,855.51 3943,2214.45 3961.86,2233.31 3963.72,2233.31 3973.43,2243.02 4012.02,2243.02 4222,2453 4222,3610.91 2997.48,4835.43 2997.48,5102.52 J1.2
M23_CSP: J1.1 M2.6 M3.6 | length 6763.2
  Internal Copper Layer 2 w20: M2.6@2280.31,625 2280.31,596.04 2452.36,424 3476.13,424 3918,865.87 3918,2228.82 3961.86,2272.68 3963.72,2272.68 3971.36,2280.31 4013.96,2280.31 4197,2463.36 4197,3600.55 2950.76,4846.79 2950.76,5049.24 J1.1
M23_SCLKN: J1.4 M2.7 M3.7 | length 6807.8
  Internal Copper Layer 2 w20: M2.7@2319.68,625 2319.68,592.03 2462.71,449 3465.78,449 3893,876.22 3893,2243.19 3961.86,2312.05 3963.72,2312.05 3971.36,2319.68 3975,2319.68 4017.97,2319.68 4172,2473.71 4172,3590.2 2897.48,4864.72 2897.48,5102.52 J1.4
M23_SCLKP: J1.3 M2.8 M3.8 | length 6610.8
  Internal Copper Layer 2 w20: M2.8@2359.51,625 2359.51,587.56 2473.07,474 3455.42,474 3494.42,513 3868,886.58 3868,2257.56 3961.86,2351.42 3963.72,2351.42 3971.36,2359.05 3975,2359.05 4021.99,2359.05 4147,2484.07 4147,3579.84 2850,4876.84 J1.3
VDD: J1.25 M1.4 M2.4 M3.4 M4.4 | length 11891.8
  Internal Copper Layer 1 w30: 2001,821 2078,821 2198.94,700.06 2198.94,625 M2.4@2202.23,621.7 ; M3.4@3975.81,2201 4060,2201 4099,2240 4099,2300
  Internal Copper Layer 1 w50: 2000,821 597,821 537,881 v1(537,2398) 537,3980.44 997.56,4441 v1(2406,4441) 2407,4442 3617.44,4442 4099,3960.44 4099,2300
  Internal Copper Layer 2 w30: v1(537,2398) 624.57,2398 M1.4@625,2398.43 ; M4.4@2398.43,3975 2398.43,4433.43 v1(2406,4441)
  Internal Copper Layer 2 w50: v1(1750,4443) J1.25
VSTIMN: J1.27 M1.2 M2.2 M3.2 M4.2 | length 12562.5
  Internal Copper Layer 1 w30: 1988,714 2085,714 2120.2,678.8 2120.2,628.58 2122.83,625.94 M2.2@2122.83,625 ; M3.2@3975,2122.83 4081.83,2122.83 4209,2250 4209,2300
  Internal Copper Layer 1 w50: v1@1650,4551 952,4551 427,4026 v1(427,2477) 427,835.44 551.44,711 2000,711 ; v1@1652,4551 2014.22,4551 2015.22,4552 v1(2506,4552) 3663,4552 4209,4006 ; 4209,2300 4209,4001
  Internal Copper Layer 2 w30: v1(427,2477) 624.83,2477 M1.2@625,2477.17 ; M4.2@2477.17,3975 2477.17,4214.55 2506,4243.39 v1(2506,4552)
  Internal Copper Layer 2 w50: v1(1650,4553) J1.27
VSTIMP: J1.28 M1.3 M2.3 M3.3 M4.3 | length 12358.8
  Internal Copper Layer 1 w30: 1998,765 2084,765 2161.54,687.46 2161.54,625.66 M2.3@2162.2,625 ; M3.3@3975.94,2162.2 4071.2,2162.2 4154,2245 4154,2300
  Internal Copper Layer 1 w50: 2000,766 574.22,766 482,858.22 v1(482,2438) 482,4003.22 974.78,4496 2037,4496 ; 2038,4497 v1(2452,4497) 3640.22,4497 4154,3983.22 4154,2300
  Internal Copper Layer 2 w30: v1(482,2438) 624.8,2438 M1.3@625,2437.8 ; M4.3@2437.8,3975 2437.8,4224.68 2452,4238.88 v1(2452,4497)
  Internal Copper Layer 2 w50: v1(1595,4498) 1577,4516 1577,5072.39 1642.52,5137.91 1642.52,5138.47 1650,5145.95 J1.28
pads on no net: M1.13 M2.13 M3.13 M4.13

## Polygon pours and split planes (outlines as drawn)
GND on Bottom Copper Layer "GND_L04_P008" (solid, pour order 8): 0,0 4600,0 4600,5400 0,5400
GND on Top Copper Layer "GND_L01_P009" (solid, pour order 9): 4600,0 0,0 0,5400 4600,5400

## Other copper
Top Copper Layer:
  pour cut-out: 1000,1000 1000,3600 3600,3600 3600,1000
Bottom Copper Layer:
  pour cut-out: 1000,1000 1000,3600 3600,3600 3600,1000

## Silkscreen, mask and mechanical layers (free items; w line width, h text height)
Bottom Overlay:
  text "GND" at 317.43,4950.74 h100
  text "GND" at 4417.43,4950.74 h100
  text "OpenMEA" at 4050,4681.33 h120
  text "Headstage" at 4050,4562.55 h120
  text "Mar 2023" at 4050,4441.33 h120

## Text inside footprints (layer, text, board x,y; h text height)
J1: Bottom Overlay "28" at 1581.89,5135.43 h40; Bottom Overlay "27" at 1581.89,5029.13 h40; Bottom Overlay "2" at 3045.67,5135.43 h40; Bottom Overlay "1" at 3033.86,5029.13 h40
J2: Top Overlay "R18" at 1465,1310.97 h30 r90; Top Overlay "R88" at 3214.06,1435 h30; Top Overlay "54" at 3065,3214.06 h30 r90; Top Overlay "55" at 3214.06,1535 h30; Top Overlay "71" at 2964.99,3214.06 h30 r90; Top Overlay "63" at 2865,3214.06 h30 r90; Top Overlay "62" at 2764.99,3214.06 h30 r90; Top Overlay "61" at 2665,3214.06 h30 r90; Top Overlay "53" at 2564.99,3214.06 h30 r90; Top Overlay "52" at 2464.99,3214.06 h30 r90; Top Overlay "51" at 2365,3214.06 h30 r90; Top Overlay "41" at 2265,3214.05 h30 r90; Top Overlay "42" at 2165,3214.05 h30 r90; Top Overlay "43" at 2065,3214.05 h30 r90; Top Overlay "31" at 1965,3214.05 h30 r90; Top Overlay "32" at 1865,3214.05 h30 r90; Top Overlay "21" at 1765,3214.05 h30 r90; Top Overlay "22" at 1665,3214.05 h30 r90; Top Overlay "11" at 1565,3214.05 h30 r90; Top Overlay "88" at 3065,1335.96 h30 r90; Top Overlay "77" at 2965,1335.96 h30 r90; Top Overlay "78" at 2865,1335.96 h30 r90; Top Overlay "67" at 2765,1335.96 h30 r90; Top Overlay "68" at 2665,1335.96 h30 r90; Top Overlay "56" at 2565,1335.96 h30 r90; Top Overlay "57" at 2465,1335.96 h30 r90; Top Overlay "58" at 2365,1335.96 h30 r90; Top Overlay "48" at 2265,1335.96 h30 r90; Top Overlay "47" at 2165,1335.96 h30 r90; Top Overlay "46" at 2065,1335.96 h30 r90; Top Overlay "38" at 1965,1335.96 h30 r90; Top Overlay "37" at 1865,1335.96 h30 r90; Top Overlay "36" at 1765,1335.96 h30 r90; Top Overlay "28" at 1665,1335.96 h30 r90; Top Overlay "87" at 3214.06,1635 h30; Top Overlay "66" at 3214.06,1735 h30; Top Overlay "76" at 3214.06,1835 h30; Top Overlay "86" at 3214.06,1935 h30; Top Overlay "65" at 3214.06,2035 h30; Top Overlay "75" at 3214.06,2135 h30; Top Overlay "85" at 3214.06,2235 h30; Top Overlay "84" at 3214.06,2335 h30; Top Overlay "74" at 3214.06,2435 h30; Top Overlay "64" at 3214.06,2535 h30; Top Overlay "83" at 3214.06,2635 h30; Top Overlay "73" at 3214.06,2735 h30; Top Overlay "82" at 3214.06,2835 h30; Top Overlay "72" at 3214.06,2935 h30; Top Overlay "81" at 3214.06,3035 h30; Top Overlay "18" at 1340.96,1535 h30; Top Overlay "27" at 1335.96,1635 h30; Top Overlay "17" at 1340.96,1735 h30; Top Overlay "26" at 1335.96,1835 h30; Top Overlay "16" at 1340.96,1935 h30; Top Overlay "35" at 1335.96,2035 h30; Top Overlay "25" at 1335.96,2135 h30; Top Overlay "15" at 1340.96,2235 h30; Top Overlay "14" at 1340.96,2335 h30; Top Overlay "24" at 1335.96,2435 h30; Top Overlay "34" at 1335.96,2535 h30; Top Overlay "13" at 1340.96,2635 h30; Top Overlay "23" at 1335.96,2735 h30; Top Overlay "33" at 1335.96,2835 h30; Top Overlay "12" at 1340.96,2935 h30; Top Overlay "44" at 1335.96,3035 h30; Top Overlay "45" at 1565,1335.96 h30 r90; Top Overlay "R81" at 3164.99,3214.06 h30 r90; Top Overlay "R11" at 1320.97,3135 h30